# EAGLE board Konnektduino.core.Rev.1.0 (EAGLE 8.6.0)
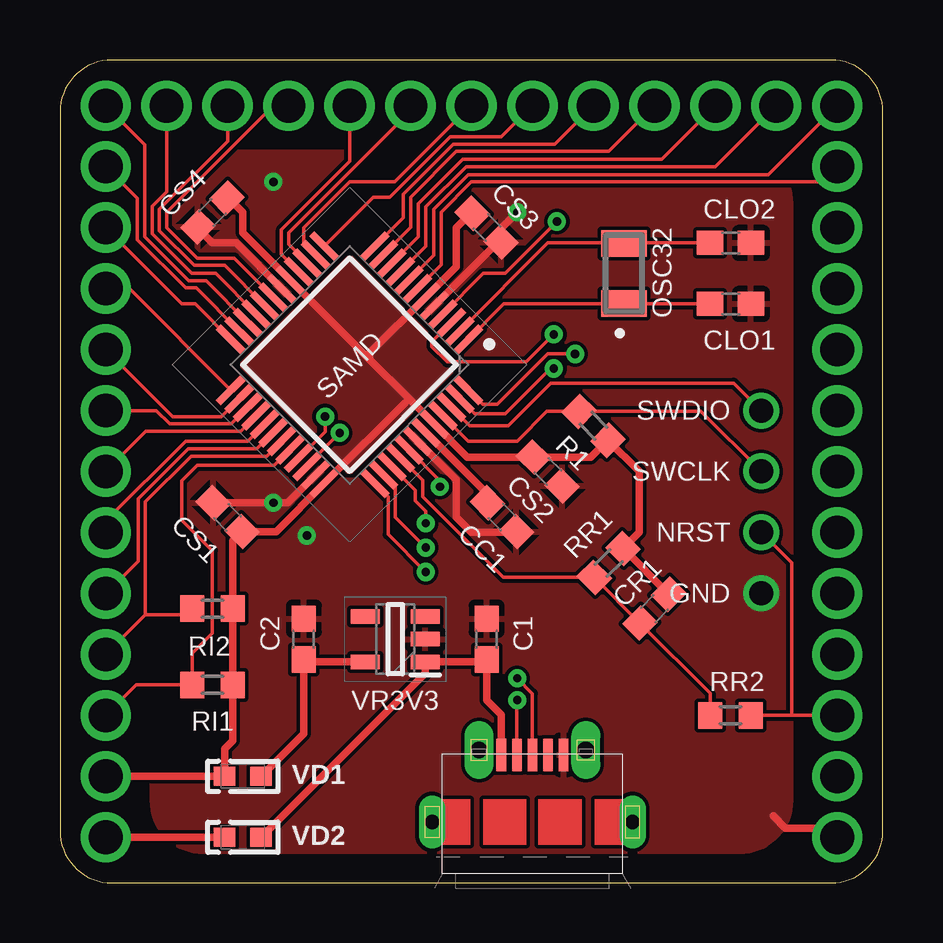
[diagram p0: board, top side]
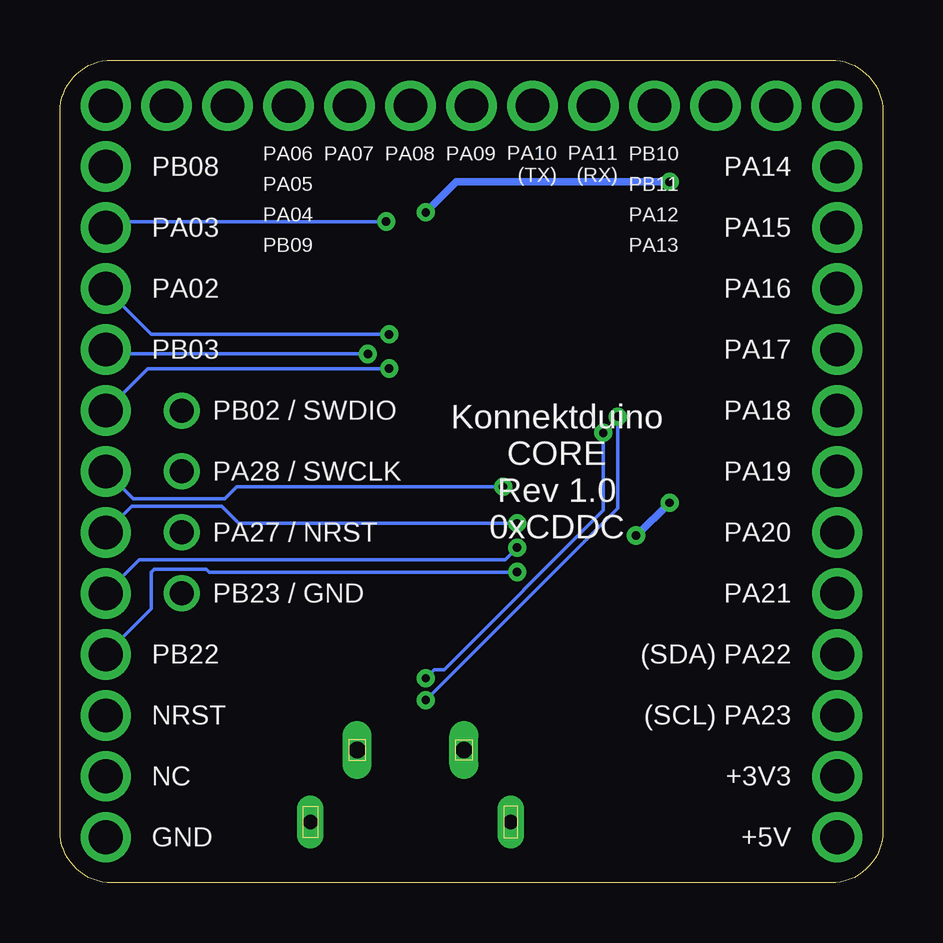
[diagram p1: board, bottom side, seen from below]

Size 34.29 x 34.29 mm. Coordinates in mm from the lower left corner, seen from the top.
Outline: 2.17,0 32.12,0 arc90 34.29,2.17 34.29,32.12 arc90 32.12,34.29 2.17,34.29 arc90 0,32.12 0,2.17 arc90 2.17,0
Copper layers (1*16): Top 0.035mm / dielectric 1.5mm / Bottom 0.035mm
Design rules "default *": minimum track width 6mil, minimum drill 0.35mm, track to track 6mil, track to pad 6mil, pad to pad 6mil, via to via 6mil, smd to smd 6mil, copper to edge 25mil, drill to drill 6mil, minimum pad ring 10mil, minimum via ring 8mil, stop-mask expansion 1mil, vias tented up to drill 25mil, thermal gap 10mil

## Footprints (pad centres in the part's own frame; a part is rotated, then mirrored left to right if it is on the bottom)
C0603 = smd 1.1 x 1: 1 -0.85,0; 2 0.85,0
ABS-07 = smd 1.1 x 1.9: 1 -1.25,0; 2 1.25,0
R0603 = smd 1 x 1.1: 1 -0.85,0; 2 0.85,0
QFP50P900X900X120-48N = smd 1.475 x 0.3: 1 -4.238,2.75; 2 -4.238,2.25; 3 -4.238,1.75; 4 -4.238,1.25; 5 -4.238,0.75; 6 -4.238,0.25; 7 -4.238,-0.25; 8 -4.238,-0.75; 9 -4.238,-1.25; 10 -4.238,-1.75; 11 -4.238,-2.25; 12 -4.238,-2.75; 25 4.238,-2.75; 26 4.238,-2.25; 27 4.238,-1.75; 28 4.238,-1.25; 29 4.238,-0.75; 30 4.238,-0.25; 31 4.238,0.25; 32 4.238,0.75; 33 4.238,1.25; 34 4.238,1.75; 35 4.238,2.25; 36 4.238,2.75 | smd 0.3 x 1.475: 13 -2.75,-4.238; 14 -2.25,-4.238; 15 -1.75,-4.238; 16 -1.25,-4.238; 17 -0.75,-4.238; 18 -0.25,-4.238; 19 0.25,-4.238; 20 0.75,-4.238; 21 1.25,-4.238; 22 1.75,-4.238; 23 2.25,-4.238; 24 2.75,-4.238; 37 2.75,4.238; 38 2.25,4.238; 39 1.75,4.238; 40 1.25,4.238; 41 0.75,4.238; 42 0.25,4.238; 43 -0.25,4.238; 44 -0.75,4.238; 45 -1.25,4.238; 46 -1.75,4.238; 47 -2.25,4.238; 48 -2.75,4.238
47589-0001 = smd 1.35 x 0.4: 1 2.8,1.3; 2 2.8,0.65; 3 2.8,0; 4 2.8,-0.65; 5 2.8,-1.3 | drill 0.6 pad 0.95 long: CASING1 0,4.175; CASING2 0,-4.175 | drill 0.7 pad 1.1 long: CASING3 3,2.225; CASING4 3,-2.225
D0603 = smd 0.9 x 0.8: A 0.762,0; C -0.762,0
SOT95P280X145-5N = smd 1.2 x 0.6: 1 -1.25,0.95; 2 -1.25,0; 3 -1.25,-0.95; 4 1.25,-0.95; 5 1.25,0.95

## Placement (x,y rotation side)
C1  1uF  [C0603]  17.78,10.16 90 top
C2  2.2uF  [C0603]  10.16,10.16 90 top
CC1  1uF  [C0603]  18.41,15.24 315 top
CLO1  15pF  [C0603]  27.94,24.13 180 top
CLO2  15pF  [C0603]  27.94,26.67 180 top
CR1  100pF  [C0603]  24.77,11.43 225 top
CS1  100nf  [C0603]  6.99,15.24 135 top
CS2  100nf  [C0603]  20.32,17.14 315 top
CS3  100nf  [C0603]  17.78,27.3 315 top
CS4  100nf  [C0603]  6.35,27.94 225 top
OSC32  ABS07-32.768KHZ-7-T  [ABS-07]  23.5,25.4 90 top
R1  1k  [R0603]  22.23,19.05 315 top
RI1  4k7  [R0603]  6.35,8.26 0 top
RI2  4k7  [R0603]  6.35,11.43 180 top
RR1  2.2k  [R0603]  22.86,13.34 45 top
RR2  330  [R0603]  27.94,6.99 0 top
SAMD  ATSAMD21G18A-AU  [QFP50P900X900X120-48N]  12.06,21.59 225 top
USBCON  MICRO-USB-RECEPTACLE47589-0001  [47589-0001]  19.68,2.54 90 top
VD1  [D0603]  7.62,4.45 0 top
VD2  [D0603]  7.62,1.91 0 top
VR3V3  TPS70933DBVT  [SOT95P280X145-5N]  13.97,10.16 180 top

## Library data of the parts
C1 C2 CC1 CLO1 CLO2 CR1 CS1-CS4 = rcl; SPICEPREFIX: C
OSC32 = ABS07-32.768KHZ-7-T; ARROW_PART_NUMBER: ABS07-32.768KHZ-7-T; ARROW_PRICE/STOCK: https://www.arrow.com/en/products/abs07-32.768khz-7-t/abracon; DESCRIPTION: ABRACON - ABS07-32.768KHZ-7-T - CRYSTAL, 32.768KHZ, 7PF, SMD; HEIGHT: mm; MANUFACTURER_NAME: ABRACON; MANUFACTURER_PART_NUMBER: ABS07-32.768KHZ-7-T; RS_PART_NUMBER: 1712773P; RS_PRICE/STOCK: http://uk.rs-online.com/web/p/products/1712773P
R1 RI1 RI2 RR1 RR2 = resistor
SAMD = ATSAMD21G18A-AU; ARROW_PART_NUMBER: ATSAMD21G18A-AU; ARROW_PRICE-STOCK: https://www.arrow.com/en/products/atsamd21g18a-au/microchip-technology; DESCRIPTION: ATMEL - ATSAMD21G18A-AU - MCU, 32BIT, CORTEX-M0+, 48MHZ, TQFP-48; HEIGHT: 1.2mm; MANUFACTURER_NAME: Microchip; MANUFACTURER_PART_NUMBER: ATSAMD21G18A-AU; RS_PART_NUMBER: 1773799P; RS_PRICE-STOCK: http://uk.rs-online.com/web/p/products/1773799P
USBCON = con-molex-usb
VD1 VD2 = diode
VR3V3 = TPS70933DBVT; ARROW_PART_NUMBER: TPS70933DBVT; ARROW_PRICE-STOCK: https://www.arrow.com/en/products/tps70933dbvt/texas-instruments; DESCRIPTION: 150mA 30V Ultra-Low-Iq Wide-Input Low-Dropout (LDO) Regulator With Reverse Current Protection; HEIGHT: 1.45mm; MANUFACTURER_NAME: Texas Instruments; MANUFACTURER_PART_NUMBER: TPS70933DBVT; RS_PART_NUMBER: 8257033P; RS_PRICE-STOCK: http://uk.rs-online.com/web/p/products/8257033P

## Nets
+3V3: CR1.1 CS1.1 CS2.1 CS3.1 CS4.1 R1.2 RI1.2 RI2.1 RR1.2 SAMD.6 SAMD.17 SAMD.36 SAMD.44 VD1.C
+5V: VD2.C
GND: C1.2 C2.2 CC1.2 CLO1.1 CLO2.1 CS1.2 CS2.2 CS3.2 CS4.2 SAMD.5 SAMD.18 SAMD.35 SAMD.42 USBCON.5 VR3V3.2
N$23: C2.1 VD1.A VR3V3.5
NRST: CR1.2 RR1.1 RR2.1 SAMD.40
PA02: SAMD.3
PA03: SAMD.4
PA04: SAMD.9
PA05: SAMD.10
PA06: SAMD.11
PA07: SAMD.12
PA08: SAMD.13
PA09: SAMD.14
PA10: SAMD.15
PA11: SAMD.16
PA12: SAMD.21
PA13: SAMD.22
PA14: SAMD.23
PA15: SAMD.24
PA16: SAMD.25
PA17: SAMD.26
PA18: SAMD.27
PA19: SAMD.28
PA20: SAMD.29
PA21: SAMD.30
PA22: RI2.2 SAMD.31
PA23: RI1.1 SAMD.32
PA27: SAMD.39
PA28: SAMD.41
PB02: SAMD.47
PB03: SAMD.48
PB08: SAMD.7
PB09: SAMD.8
PB10: SAMD.19
PB11: SAMD.20
PB22: SAMD.37
PB23: SAMD.38
RESET: RR2.2
SWCLK: R1.1 SAMD.45
SWDIO: SAMD.46
USB+: SAMD.34 USBCON.3
USB-: SAMD.33 USBCON.2
USBID: USBCON.4
VDDCORE: CC1.1 SAMD.43
VUSB: C1.1 USBCON.1 VD2.A VR3V3.1
X32IN: CLO1.2 OSC32.1 SAMD.1
X32OUT: CLO2.2 OSC32.2 SAMD.2

## Tracks (layer width: path | path; a pad name or v marks a point on that pad's centre or on a via)
+3V3  (via drill 1.4)
  Top 0.305: CS3.1 17.11,27.91 16.51,27.3 16.51,25.68 SAMD.6 12.91,22.08 12.91,21.8 | CR1.1 RR1.2 24.13,14.61 24.13,17.14 R1.2 22.12,17.75 CS2.1 16.97,17.75 SAMD.44 14.5,20.21 | 12.91,21.8 SAMD.17 7.62,27.1 7.62,27.94 7.02,28.54 CS4.1 | 12.91,21.8 14.5,20.21 | 14.5,20.21 14.5,20.14 SAMD.36 9,14.64 CS1.1 7.2,14.25 RI2.1 RI1.2 7.2,5.93 6.86,5.59 VD1.C v1.91,4.45
  pour Top: 12.06,17.14 16.51,21.59 12.06,26.04 7.62,21.59
+5V  (via drill 1.4)
  Top 0.305: VD2.C v1.91,1.91
GND  (via drill 0.35, 1, 1.4)
  Top 0.305: SAMD.5 18.24,26.7 CS3.2 18.38,27.27 v19.05,27.94 | SAMD.42 16.51,16.79 16.51,15.24 17.14,14.61 18.98,14.61 CC1.2 | SAMD.18 7.34,26.67 6.35,26.67 5.75,27.27 CS4.2 | v32.38,1.91 32,2.29 30.23,2.29 29.72,2.79 | SAMD.35 9.5,15.84 v8.89,15.84 CS1.2
  Bottom 0.305: v19.05,27.94 17.78,29.21 v8.89,29.21 | v8.89,15.84 10.25,14.48 v10.29,14.48
  other vias: 29.21,12.06
  pour Top (rank 2): 30.48,28.31 30.48,3.44 arc-90 28.31,1.27 5.98,1.27 arc-90 3.81,3.44 3.81,28.31 arc-90 5.98,30.48 28.31,30.48 arc-90
N$23
  Top 0.305: VD1.A 10.16,6.22 C2.1 10.26,9.21 VR3V3.5
NC01  (via drill 1.4)
  other vias: 32.38,4.45
NRST
  Top 0.152: RR2.1 27.09,7.9 CR1.2 RR1.1 18.48,12.73 15.11,16.1 15.11,16.77 SAMD.40
PA02  (via drill 0.35, 1.4)
  Top 0.152: SAMD.3 15.49,22.54 15.49,22.35 16.13,21.72 19.43,21.72 v20.57,22.86
  Bottom 0.152: v20.57,22.86 30.48,22.86 v32.38,24.77
PA03  (via drill 0.35, 1.4)
  Top 0.152: SAMD.4 17.64,25.4 18.54,25.4 v20.7,27.56
  Bottom 0.152: v20.7,27.56 32.13,27.56 v32.38,27.3
PA04  (via drill 1.4)
  Top 0.152: SAMD.9 15.24,26.53 15.24,28.17 16.92,29.84 27.3,29.84 v29.84,32.38
PA05  (via drill 1.4)
  Top 0.152: SAMD.10 14.94,26.93 14.94,28.29 16.79,30.15 25.07,30.15 v27.3,32.38
PA06  (via drill 1.4)
  Top 0.152: SAMD.11 14.61,27.31 14.61,28.57 16.51,30.48 22.86,30.48 v24.77,32.38
PA07  (via drill 1.4)
  Top 0.152: SAMD.12 14.3,27.71 14.3,28.7 16.38,30.79 20.62,30.79 v22.23,32.38
PA08  (via drill 1.4)
  Top 0.152: SAMD.13 13.06,28.57 13.74,28.57 16.26,31.09 18.39,31.09 v19.68,32.38
PA09  (via drill 1.4)
  Top 0.152: SAMD.14 10.16,26.68 10.16,27.04 10.16,27.05 10.16,27.3 12.06,29.21 13.95,29.21 17.12,32.38 v17.14,32.38
PA10  (via drill 1.4)
  Top 0.152: SAMD.15 9.53,26.61 9.53,27.1 14.61,32.18 v14.61,32.38
PA11  (via drill 1.4)
  Top 0.152: v12.06,32.38 12.06,30.07 9.22,27.23 9.22,26.2 SAMD.16
PA12  (via drill 1.4)
  Top 0.152: SAMD.21 6.49,25.4 5.49,25.4 3.83,27.05 3.83,28.19 4.45,28.8 v4.45,32.38
PA13  (via drill 1.4)
  Top 0.152: SAMD.22 6.08,25.09 5.36,25.09 3.53,26.93 3.53,30.76 v1.91,32.38
PA14  (via drill 1.4)
  Top 0.152: SAMD.23 5.68,24.79 5.24,24.79 3.23,26.8 3.23,28.52 v1.91,29.84
PA15  (via drill 1.4)
  Top 0.152: SAMD.24 5.64,24.13 5.08,24.13 v1.91,27.3
PA16  (via drill 1.4)
  Top 0.152: SAMD.25 2.9,24.77 v1.91,24.77
PA17  (via drill 1.4)
  Top 0.152: SAMD.26 6.72,19.43 4.7,19.43 v1.91,22.23
PA18  (via drill 1.4)
  Top 0.152: v1.91,19.68 4.01,19.68 4.57,19.13 7.13,19.13 SAMD.27
PA19  (via drill 1.4)
  Top 0.152: SAMD.28 7.53,18.82 3.58,18.82 v1.91,17.14
PA20  (via drill 1.4)
  Top 0.152: SAMD.29 7.83,18.41 5.23,18.41 1.91,15.09 v1.91,14.61
PA21  (via drill 1.4)
  Top 0.152: SAMD.30 8.21,18.09 5.33,18.09 3.25,16 3.25,13.41 v1.91,12.06
PA22  (via drill 1.4)
  Top 0.152: SAMD.31 8.61,17.78 5.46,17.78 3.56,15.88 3.56,11.18 | 3.56,11.18 v1.91,9.53 | RI2.2 5.25,11.18 3.56,11.18
PA23  (via drill 1.4)
  Top 0.152: v1.91,6.99 3.17,8.26 RI1.1 5.5,9.56 6.35,10.41 6.35,13.84 5.08,15.11 5.08,16.76 5.71,17.4 8.94,17.4 SAMD.32
PA27  (via drill 0.35, 1.4)
  Top 0.152: SAMD.39 14.81,16.37 14.81,15.93 15.24,15.49 v15.24,14.99
  Bottom 0.152: v32.38,14.61 31.29,15.7 27.56,15.7 26.85,14.99 v15.24,14.99
PA28  (via drill 0.35, 1.4)
  Top 0.152: SAMD.41 15.83,16.77 v15.83,16.51
  Bottom 0.152: v15.83,16.51 26.93,16.51 27.43,16 31.24,16 v32.38,17.14
PB02  (via drill 0.35, 1.4)
  Top 0.152: SAMD.47 17.28,19.56 18.54,19.56 20.42,21.43 v20.57,21.43
  Bottom 0.152: v20.57,21.43 30.64,21.43 v32.38,19.68
PB03  (via drill 0.35, 1.4)
  Top 0.152: SAMD.48 17.61,19.94 18.22,19.94 20.32,22.04 v21.46,22.04
  Bottom 0.152: v21.46,22.04 32.2,22.04 v32.38,22.23
PB08  (via drill 1.4)
  Top 0.152: SAMD.7 15.88,25.75 15.88,27.94 17.14,29.21 31.75,29.21 v32.38,29.84
PB09  (via drill 1.4)
  Top 0.152: SAMD.8 15.57,26.16 15.57,28.07 17.02,29.52 29.52,29.52 v32.38,32.38
PB10  (via drill 1.4)
  Top 0.152: SAMD.19 7.27,26.04 5.71,26.04 4.45,27.3 4.45,27.94 8.89,32.38 v9.53,32.38
PB11  (via drill 1.4)
  Top 0.152: SAMD.20 6.86,25.73 5.59,25.73 4.14,27.18 4.14,28.07 6.99,30.91 v6.99,32.38
PB22  (via drill 0.35, 1.4)
  Top 0.152: SAMD.37 13.67,16.1 13.67,14.53 v15.24,12.95
  Bottom 0.152: v15.24,12.95 28.07,12.95 28.19,13.08 30.35,13.08 30.48,12.95 30.48,11.43 v32.38,9.53
PB23  (via drill 0.35, 1.4)
  Top 0.152: SAMD.38 13.47,16.89 13.59,16.89 13.97,16.51 13.97,15.24 v15.24,13.97
  Bottom 0.152: v32.38,12.06 30.99,13.46 15.75,13.46 v15.24,13.97
RESET  (via drill 1, 1.4)
  Top 0.152: RR2.2 30.48,6.99 | 30.48,6.99 v32.38,6.99 | 30.48,6.99 30.48,13.34 v29.21,14.61
SWCLK  (via drill 1)
  Top 0.152: SAMD.45 17.01,18.41 19.05,18.41 20.29,19.65 R1.1 26.7,19.65 v29.21,17.14
SWDIO  (via drill 1)
  Top 0.152: SAMD.46 17.08,19.05 18.67,19.05 20.45,20.83 28.07,20.83 v29.21,19.68
USB+  (via drill 0.35)
  Top 0.152: USBCON.3 19.68,7.89 v19.05,8.53 | v11.66,18.75 10.31,17.4 SAMD.34
  Bottom 0.152: v19.05,8.53 18.69,8.89 18.29,8.89 11.66,15.52 v11.66,18.75
USB-  (via drill 0.35)
  Top 0.152: USBCON.2 19.04,7.61 v19.05,7.62 | v11.05,19.43 11.05,18.81 SAMD.33
  Bottom 0.152: v19.05,7.62 11.05,15.62 v11.05,19.43
VDDCORE
  Top 0.305: SAMD.43 17.81,16.2 CC1.1
VUSB
  Top 0.305: VD2.A 15.22,8.74 VR3V3.1 17.68,9.21 C1.1 17.78,7.62 18.39,7.01 USBCON.1
X32IN
  Top 0.152: OSC32.1 23.52,24.13 | 23.52,24.13 CLO1.2 | SAMD.1 18.49,24.13 23.52,24.13
X32OUT
  Top 0.152: OSC32.2 23.52,26.67 | 23.52,26.67 24.13,26.67 CLO2.2 | SAMD.2 20.33,26.67 23.52,26.67

## Text on the board
tNames: SWDIO | SWCLK | NRST | GND
bNames: PB10 | PA09 | PA08 | PA07 | PA06 | PA14 | PB11 | PA11 / (RX) | PA10 / (TX) | PA05 | PB08 | PA12 | PA04 | PA15 | PA03 | PA13 | PB09 | PA16 | PA02 | PA17 | PB03 | PA18 | PB02 / SWDIO | PA19 | PA28 / SWCLK | Konnektduino / CORE / Rev 1.0 / 0xCDDC | PA20 | PA27 / NRST | PA21 | PB23 / GND | (SDA) PA22 | PB22 | (SCL) PA23 | NRST | +3V3 | NC | +5V | GND